# Altium PCB PCB1.PcbDoc
Units mil, origin at the board's own origin, x right, y up, seen from the top; angles counter-clockwise.
Board outline 6000 x 4000 mil, 2 copper layers (Top Layer, Bottom Layer); 3 components, 8 nets, 52 pads, 0 vias.
Unrouted connection lines stored in the file: 8.
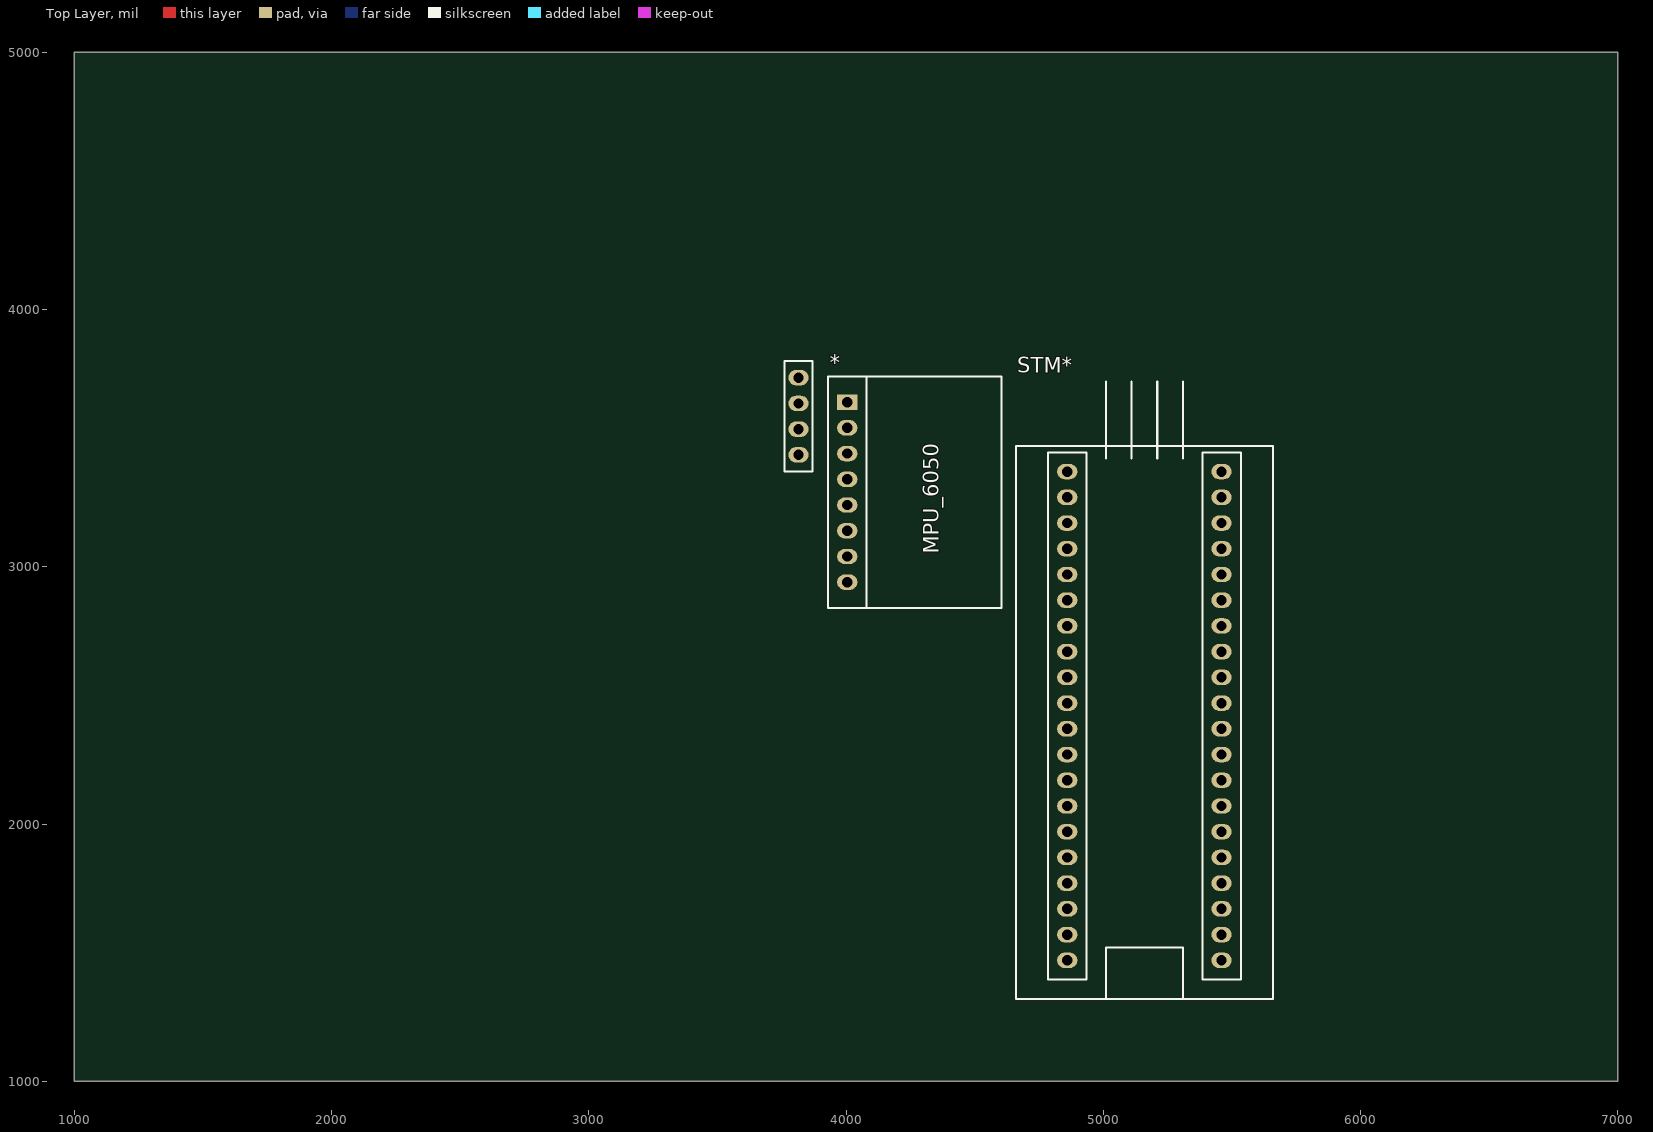
[diagram p0: Top Layer view]
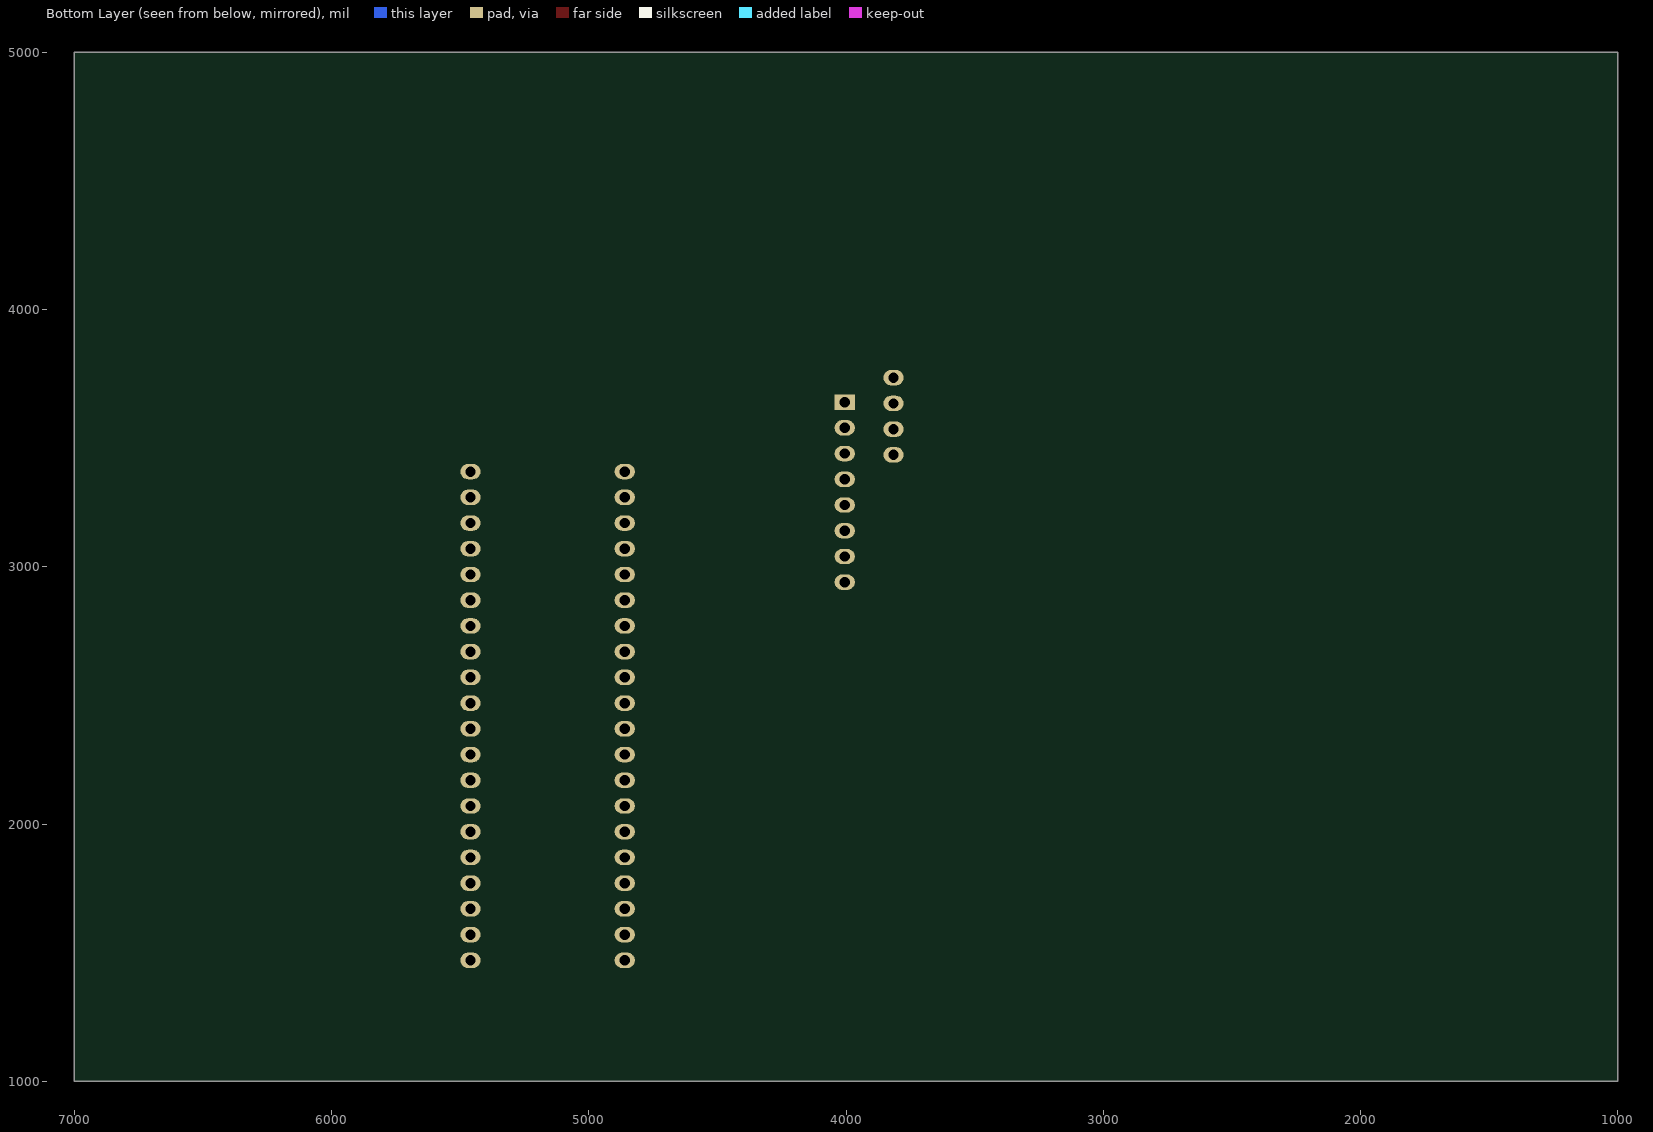
[diagram p1: Bottom Layer view, seen from below]

## Layer stack, top to bottom
Top Solder: solder mask 0.4, Solder Resist, Dk 3.5
Top Layer: signal copper 1.4
Dielectric 1: dielectric 12.6, FR-4, Dk 4.8
Bottom Layer: signal copper 1.4
Bottom Solder: solder mask 0.4, Solder Resist, Dk 3.5

## Board outline
1000,1000 7000,1000 7000,5000 1000,5000

## Design rules (kind name [scope] priority, off if disabled: settings)
Clearance [All] p1: gap=10 ignorepadtopadclearanceinfootprint=FALSE except(0: Arc-Hole Track-Hole SMDPad-Hole THPad-Hole Via-Hole Fill-Hole Poly-Hole Region-Hole Text-Hole)
PolygonConnect [All] p1: connectstyle=Relief reliefconductorwidth=10 reliefentries=4 polygonreliefangle="90 Angle" airgapwidth=10
RoutingVias [All] p1: holewidth=28 width=50 viastyle="Through Hole" minholewidth=28 minwidth=50 maxholewidth=28 maxwidth=50
SolderMaskExpansion [All] p1: expansion=4 istentingtop=FALSE
Width [All] p1: maxlimit=10 minlimit=10 preferedwidth=10
30 further rules are at their usual default settings.

## Components (designator, comment, footprint, x,y, rotation, side; value= is the part's Value field where it differs from the comment)
* "MPU_6050" MPU6050 4005,3290 r90 top
STM* "STM32" STM32 5160,2420 r90 top
? "FEMALE_HEADER_4" Female_Header_4 3815,3585 r90 top

## Footprints (in the part's own frame and the unit in brackets; to place one, negate y for a bottom-side part, rotate by r counter-clockwise, add the part's x,y. Pads: shape width x height; smd on the part's side, far side on the other; paste and mask are expansions set on the pad)
Female_Header_4 [mil]
  oval 60x78.74 hole 40: 1(-150,0) 2(-50,0) 3(50,0) 4(150,0)
  silkscreen extent -215,-55 215,55, body extent -210,-50 210,50, height 336
MPU6050 [mm]
  oval 1.524x2 hole 1.02: ADO(-6.35,0) GND(6.35,0) INT(-8.89,0) SCL(3.81,0) SDA(1.27,0) XCL(-3.81,0) XDA(-1.27,0)
  rect 1.524x2 hole 1.02: VCC(8.89,0)
  silkscreen extent -11.43,-15.24 11.43,1.91, body extent -10.55,-14.6 10.55,1.27, height 14.64
STM32 [mm]
  oval 1.524x2 hole 1.02: 3V3(-19.05,7.62) 3V3(24.13,-7.62) 5V(19.05,-7.62) GND(-24.13,7.62) GND(-21.59,7.62) GND(21.59,-7.62) PA_0(13.97,7.62) PA_1(11.43,7.62) PA_2(8.89,7.62) PA_3(6.35,7.62) PA_4(3.81,7.62) PA_5(1.27,7.62) PA_6(-1.27,7.62) PA_7(-3.81,7.62) PA_8(-13.97,-7.62) PA_9(-11.43,-7.62) PA_10(-8.89,-7.62) PA_11(-6.35,-7.62) PA_12(-3.81,-7.62) PA_15(-1.27,-7.62) PB-4(3.81,-7.62) PB-5(6.35,-7.62) PB_0(-6.35,7.62) PB_1(-8.89,7.62) PB_3(1.27,-7.62) PB_6(8.89,-7.62) PB_7(11.43,-7.62) PB_8(13.97,-7.62) PB_9(16.51,-7.62) PB_10(-11.43,7.62) PB_11(-13.97,7.62) PB_12(-24.13,-7.62) PB_13(-21.59,-7.62) PB_14(-19.05,-7.62) PB_15(-16.51,-7.62) PC_13(21.59,7.62) PC_14(19.05,7.62) PC_15(16.51,7.62) RES(-16.51,7.62) VBT(24.13,7.62)
  silkscreen extent -27.94,-12.7 33.02,12.7, body extent -27.33,-11.43 31.09,11.43, height 21.6

## Nets (pads, with @x,y where several pads share a name; then routed paths per layer and width w, separated by ;. In a path a pad name is that pad's centre, name@x,y a point inside that pad or via, vN(x,y) a via of type N, cw(c..) or ccw(c..) an arc to the next point about the centre after c; other vN are vias at no path point)
ECHO: ?.2
GND: *.GND ?.1 STM*.GND
NetD?_1: STM*.5V
NetD?_2: 
SCL: *.SCL STM*.PB_10
SDA: *.SDA STM*.PB_11
Trig: ?.3 STM*.PB_3
VCC: *.VCC ?.4
pads on no net: *.ADO *.INT *.XCL *.XDA STM*.3V3 STM*.PA_0 STM*.PA_1 STM*.PA_2 STM*.PA_3 STM*.PA_4 STM*.PA_5 STM*.PA_6 STM*.PA_7 STM*.PA_8 STM*.PA_9 STM*.PA_10 STM*.PA_11 STM*.PA_12 STM*.PA_15 STM*.PB-4 STM*.PB-5 STM*.PB_0 STM*.PB_1 STM*.PB_6 STM*.PB_7 STM*.PB_8 STM*.PB_9 STM*.PB_12 STM*.PB_13 STM*.PB_14 STM*.PB_15 STM*.PC_13 STM*.PC_14 STM*.PC_15 STM*.RES STM*.VBT